# Altium PCB GNSS_FE_PROD.PcbDoc
Units mil, origin at the board's own origin, x right, y up, seen from the top; angles counter-clockwise.
Board outline 6000 x 4000 mil, 2 copper layers (Top Layer, Bottom Layer); 32 components, 20 nets, 100 pads, 0 vias.
Unrouted connection lines stored in the file: 80.
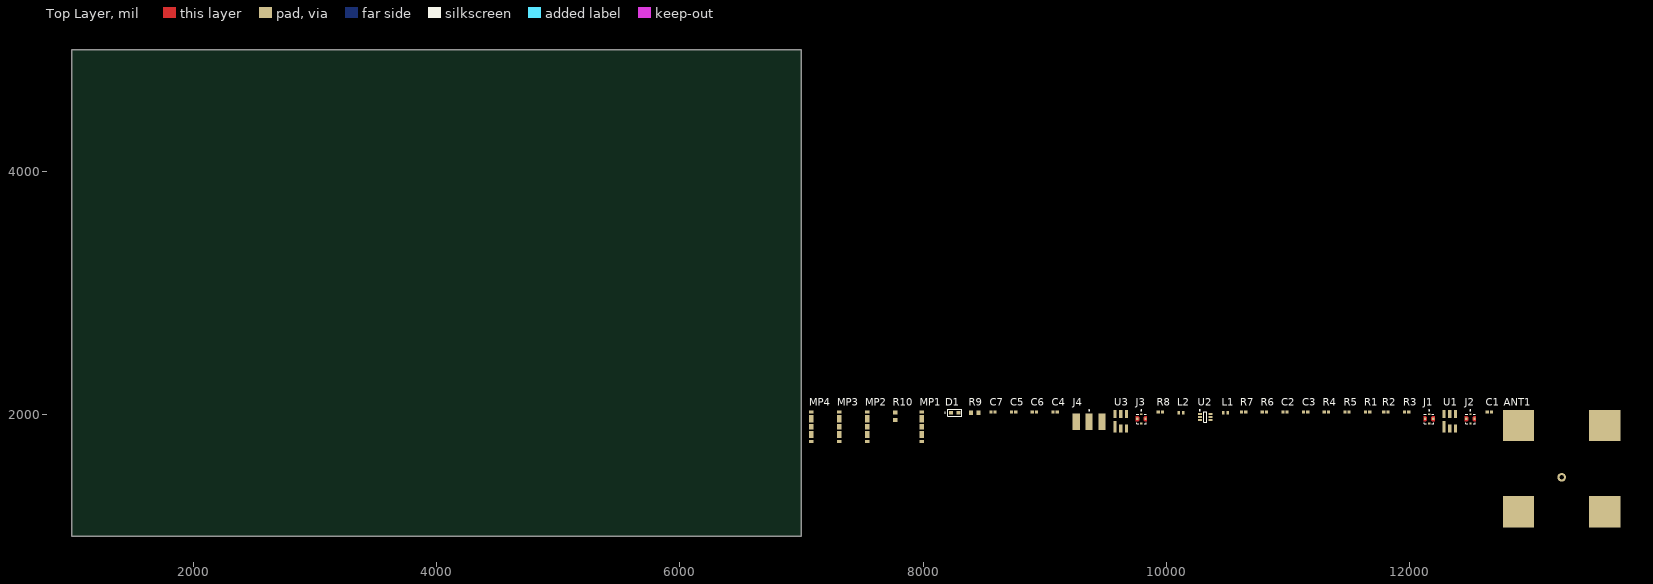
[diagram p0: Top Layer view]
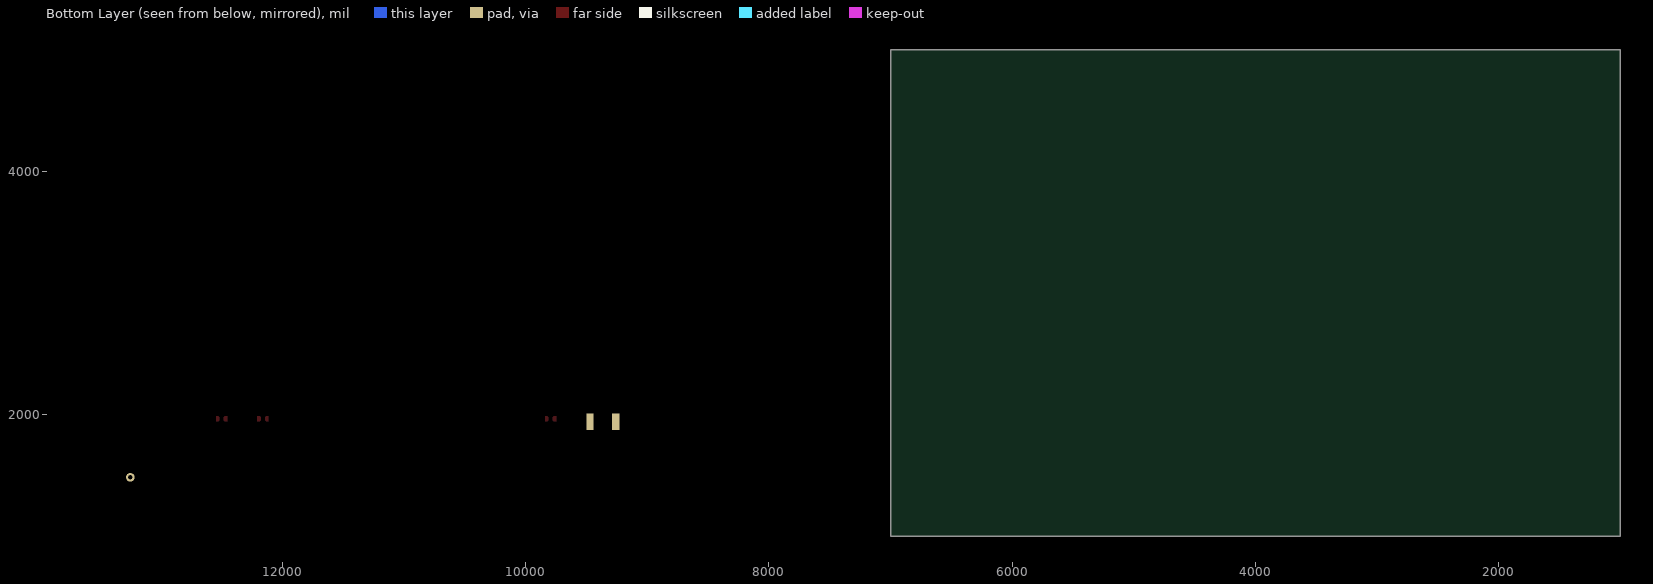
[diagram p1: Bottom Layer view, seen from below]

## Layer stack, top to bottom
Top Solder: solder mask 0.4, Solder Resist, Dk 3.5
Top Layer: signal copper 1.4
Dielectric 1: dielectric 12.6, FR-4, Dk 4.8
Bottom Layer: signal copper 1.4
Bottom Solder: solder mask 0.4, Solder Resist, Dk 3.5

## Board outline
1000,1000 7000,1000 7000,5000 1000,5000

## Design rules (kind name [scope] priority, off if disabled: settings)
Clearance Clearance_1 [OnMid vs OnMid] p1: gap=10 ignorepadtopadclearanceinfootprint=FALSE sourcerule=36 cellrowname=All cellrowtype=0 cellcolname=All cellcoltype=0 innerlayers=TRUE
Clearance Clearance_2 [(ExistsOnLayer('Top Layer') Or ExistsOnLayer('Bottom Layer')) vs (ExistsOnLayer('Top Layer') Or ExistsOnLayer('Bottom Layer'))] p2: gap=10 ignorepadtopadclearanceinfootprint=FALSE sourcerule=36 cellrowname=All cellrowtype=0 cellcolname=All cellcoltype=0 outerlayers=TRUE
Clearance [All] p3: gap=10 ignorepadtopadclearanceinfootprint=FALSE ismatrix=TRUE
PolygonConnect [All] p1: connectstyle=Relief reliefconductorwidth=10 reliefentries=4 polygonreliefangle="90 Angle" airgapwidth=10
RoutingVias [All] p1: holewidth=28 width=50 viastyle="Through Hole" minholewidth=28 minwidth=50 maxholewidth=28 maxwidth=50
SolderMaskExpansion [All] p1: expansion=4 istentingtop=FALSE
Width [All] p1: maxlimit=10 minlimit=10 preferedwidth=10
30 further rules are at their usual default settings.

## Classes and differential pairs
net class RF: NetANT1_1 NetR6_2

## Components (designator, comment, footprint, x,y, rotation, side; value= is the part's Value field where it differs from the comment)
ANT1 "ANT-GNSSCP-TH18L1" ANT-GNSSCP-TH18L1 13250,1555 r0 top
C1 "GRM1555C1H102JA01D" 0402_CAP 12655,2020 r0 top
C2 "GRM1555C1H102JA01D" 0402_CAP 10975,2020 r0 top
C3 "GRM1555C1H102JA01D" 0402_CAP 11145,2020 r0 top
C4 "GRM1555C1H102JA01D" 0402_CAP 9085,2020 r0 top
C5 "GRM1555C1H102JA01D" 0402_CAP 8745,2020 r0 top
C6 "GRM1555C1H102JA01D" 0402_CAP 8915,2020 r0 top
C7 "GRM1555C1H102JA01D" 0402_CAP 8575,2020 r0 top
D1 "Red, 2V, 140°" WL-SMCW 8260,2015 r0 top
J1 "MM8030-2610RJ3" MURATA_MM8030-2610RJ3 12160,1965 r0 top
J2 "MM8030-2610RJ3" MURATA_MM8030-2610RJ3 12500,1965 r0 top
J3 "MM8030-2610RJ3" MURATA_MM8030-2610RJ3 9795,1965 r0 top
J4 "CON-SMA-EDGE-S" RFSOLUTIONS_CON-SMA-EDGE-S 9365,1940 r90 top
L1 "LQW15AN3N6C10D" INDC1006X60N 10485,2015 r0 top value=20nH
L2 "LQW15AN3N6C10D" INDC1006X60N 10120,2015 r0 top value=5.6nH
MP1 "36900000" 36900000 7990,1900 r90 top
MP2 "36900000" 36900000 7540,1900 r90 top
MP3 "36900000" 36900000 7310,1900 r90 top
MP4 "36900000" 36900000 7080,1900 r90 top
R1 "RC0402JR-070RL" 0402_CAP 11655,2020 r0 top
R2 "RC0402JR-070RL" 0402_CAP 11805,2020 r0 top
R3 "RC0402JR-070RL" 0402_CAP 11975,2020 r0 top
R4 "RC0402JR-070RL" 0402_CAP 11315,2020 r0 top
R5 "RC0402JR-070RL" 0402_CAP 11485,2020 r0 top
R6 "RC0402JR-070RL" 0402_CAP 10805,2020 r0 top
R7 "RC0402JR-070RL" 0402_CAP 10635,2020 r0 top
R8 "RC0402JR-070RL" 0402_CAP 9950,2020 r0 top
R9 "" RC0603JR-070RL 8425,2015 r0 top
R10 "RC0603JR-070RL" RC0603JR-070RL 7770,1985 r90 top
U1 "B39162B3913U410" B39162B3913U410 12330,1945 r0 top
U2 "MAX2655EXT+T" MAX2655EXT+T 10320,1980 r0 top
U3 "B39162B3913U410" B39162B3913U410 9625,1945 r0 top

## Footprints (in the part's own frame and the unit in brackets; to place one, negate y for a bottom-side part, rotate by r counter-clockwise, add the part's x,y. Pads: shape width x height; smd on the part's side, far side on the other; paste and mask are expansions set on the pad)
0402_CAP [mm]
  rect 0.66x0.62 smd: 1(-0.44,0) 2(0.44,0)
  body extent -0.53,-0.28 0.53,0.28, height 0.55
36900000 [mm] "Shielding Cabinet Clip"
  rect 0.6x0.9 smd: 1(-3.05,0) 1(3.05,0)
  rect 1.5x0.9 smd: 1(-1.65,0) 1(1.65,0)
  rect 1.2x0.9 smd: 1(0,0)
  body extent -3.25,-0.41 3.25,0.41, height 1.28
ANT-GNSSCP-TH18L1 [mm]
  round 1.8 hole 0.95: 1(0,-1.8)
  rect 6.5x6.5 smd: 2(-9,-9) 2(-9,9) 2(9,-9) 2(9,9)
  body extent -9,-9 9,9, height 4.1
B39162B3913U410 [mm]
  rect 0.65x2.35 smd: 1(-1.2,-1.15)
  rect 0.65x1.6 smd: 2(0,-1.525) 3(1.2,-1.525) 4(1.2,1.525) 5(0,1.525) 6(-1.2,1.525)
  body extent -1.5,-1.5 1.5,1.5, height 1.1
INDC1006X60N [mm]
  rect 0.51x0.73 smd: 1(-0.46,0) 2(0.46,0)
  body extent -0.5,-0.3 0.5,0.3, height 0.6
MAX2655EXT+T [mm] "TSOP, 6-Leads, Body 2.00x1.25mm, Pitch 0.65mm, IPC Medium Density"
  rect 0.85x0.4 smd: 1(-1.125,0.65) 2(-1.125,0) 3(-1.125,-0.65) 4(1.125,-0.65) 5(1.125,0) 6(1.125,0.65)
  silkscreen extent -1.25,-1.1 0.3,1.52, body extent -1.05,-1.1 1.05,1.1, height 1.1
MURATA_MM8030-2610RJ3 [mm]
  rect 0.5x0.4 smd paste-1 mask+0: 1(0,0.95) 2(0,-0.95)
  rect 0.5x0.5 smd paste-1 mask+0: 3(-0.85,0) 4(0.85,0)
  Top Layer region: 1.15,-0.55 0.68,-0.55 0.45,-0.32 0.45,0.32 0.68,0.55 1.15,0.55
  Top Layer region: -0.45,0.32 -0.45,-0.32 -0.68,-0.55 -1.15,-0.55 -1.15,0.55 -0.68,0.55
  silkscreen extent -1,-1 1,1.85, body extent -1,-1.05 1,1.05, height 0.9
RC0603JR-070RL [mm] "Chip Resistor, 2-Leads, Body 1.60x0.80mm, IPC Medium Density"
  rect 0.85x0.9 smd: 1(-0.775,0) 2(0.775,0)
  body extent -0.85,-0.45 0.85,0.45, height 0.55
RFSOLUTIONS_CON-SMA-EDGE-S [mm]
  rect 3.5x1.5 smd: 1(0,0) 2(0,2.7) 2(0,-2.7)
  rect 3.5x1.5 smd far side: 2(0,2.7) 2(0,-2.7)
  silkscreen extent 2.3,-0.1 2.5,0.1, body extent -11.27,-3.18 2.06,3.17, height 3.55
WL-SMCW [mm]
  rect 0.8x0.8 smd: 1(-0.8,0) 2(0.8,0)
  silkscreen extent -2.07,-0.7 1.45,0.7, body extent -0.8,-0.4 0.8,0.4, height 0.7

## Part data
ANT1: "CERAMIC PATCH GNSS ANTENNA"
C1 C2 C3 C6: "CAP CER 1000PF 50V C0G/NP0 0402", Capacitance=1uF
C4: "CAP CER 1000PF 50V C0G/NP0 0402", Capacitance=1800pF
C5: "CAP CER 1000PF 50V C0G/NP0 0402", Capacitance=8.1pF
C7: "CAP CER 1000PF 50V C0G/NP0 0402", Capacitance=1.5pF
D1: library part 150060RS75000, "WL-SMCW Mono-color Chip LED Waterclear, SMT, size 0603, Red, 2V, 140°", Case/Size Code=0603, Emitting Color=Red, Forward Voltage=2V, Manufacturer="Wurth Elektronik", Operating Temperature Max=85°C, Operating Temperature Min=-40°C, Category="Signal LEDs", Chip Technology=AlInGaP, ComponentLink1Description="Website Link", ComponentLink1URL=https://www.we-online.com/redexpert/article/150060RS75000?ad, ComponentLink2Description="Datasheet Link", ComponentLink2URL=https://www.we-online.com/redexpert/spec/150060RS75000?ad, Dominant Wavelength=625nm, Height=0.7mm, Length=1.6mm, Luminous Intensity=250mcd, Manufacturer Part Number=150060RS75000, Match Code=WL-SMCW, Mount="Surface Mount", Packaging="Tape and Reel", Peak Wavelength=630nm, Viewing Angle=140°, Width=0.8mm
J1 J2 J3: "SWG Connector Receptacle, Female Socket 50Ohm Surface Mount Solder", Package=None, Digi-Key_Part_Number=490-5907-1-ND, Digi-Key_Purchase_URL=https://www.digikey.com/product-detail/en/murata-electronics/MM8030-2610RJ3/490-5907-1-ND/3635133?utm_source=snapeda&utm_medium=aggregator&utm_campaign=symbol, MF=Murata, MP=MM8030-2610RJ3, SnapEDA_Link=https://www.snapeda.com/parts/MM8030-2610RJ3/Murata%20Electronics%20North%20America/view-part/271470/?ref=snap
J4: "CONN SMA JACK STR EDGE MNT"
L1 L2: "FIXED IND 3.6NH 900MA 40 MOHM", Package=None, Availability=Unavailable, MP=LQW15AN3N6C10D, Price=None
MP1 MP2 MP3 MP4: "WE-SHC Shielding Cabinet, Clip, Tin Plated, Tape and Reel, 6.5x0.8x1.27mm", Manufacturer="Wurth Elektronik", Operating Temperature Max=125°C, Operating Temperature Min=-40°C, Base Material=Steel, Category="EMC Shielding", ComponentLink1Description="Website Link", ComponentLink1URL=https://www.we-online.com/redexpert/article/36900000?ad, ComponentLink2Description="Datasheet Link", ComponentLink2URL=https://www.we-online.com/redexpert/spec/36900000?ad, Height=1.27mm, Length=6.5mm, Manufacturer Part Number=36900000, Match Code=WE-SHC, Mount="Surface Mount", Packaging="Tape and Reel", Plating="Tin Plated", Type=Clip, Width=0.8mm
R1 R2 R3 R4 R5 R6 R7: "RES 0 OHM JUMPER 1/16W 0402", Case Code (Imperial)=0603, Case Code (Metric)=1608, Manufacturer=Yageo, Max Operating Temperature=155degC, Min Operating Temperature=-55degC, Package Description="2-Pin Surface Mount Device, Body 1.6 x 0.8 mm", Package Quantity=5000, Power Rating=100mW, Resistance=0mOhm, Temperature Coefficient=200ppm/degreesC, Tolerance=5%, Voltage Rating=50V, Case/Package=0603, Composition=ThickFilm, Contact Plating=Tin, Datasheet URL=http://www.yageo.com/NewPortal/yageodocoutput?fileName=/pdf/R-Chip/PYu-RC_Group_51_RoHS_L_5.pdf, Datasheet Version="Rev. 5, 10/2016", Depth=0.8mm, Height=0.45mm, Lead Free=LeadFree, Length=1.6mm, Manufacturer URL=http://www.yageo.com/, Military Standard=Not, Number of Pins=2, Package Reference=0603, Packaging=TapeandReel, Radiation Hardening=No, REACH SVHC=NoSVHC, RoHSCompliant=true, Termination=SMD/SMT, Voltage Rating (DC)=50V, Width=0.8mm
R8: "RES 0 OHM JUMPER 1/16W 0402", Case Code (Imperial)=0603, Case Code (Metric)=1608, Manufacturer=Yageo, Max Operating Temperature=155degC, Min Operating Temperature=-55degC, Package Description="2-Pin Surface Mount Device, Body 1.6 x 0.8 mm", Package Quantity=5000, Power Rating=100mW, Resistance=10kΩ, Temperature Coefficient=200ppm/degreesC, Tolerance=5%, Voltage Rating=50V, Case/Package=0603, Composition=ThickFilm, Contact Plating=Tin, Datasheet URL=http://www.yageo.com/NewPortal/yageodocoutput?fileName=/pdf/R-Chip/PYu-RC_Group_51_RoHS_L_5.pdf, Datasheet Version="Rev. 5, 10/2016", Depth=0.8mm, Height=0.45mm, Lead Free=LeadFree, Length=1.6mm, Manufacturer URL=http://www.yageo.com/, Military Standard=Not, Number of Pins=2, Package Reference=0603, Packaging=TapeandReel, Radiation Hardening=No, REACH SVHC=NoSVHC, RoHSCompliant=true, Termination=SMD/SMT, Voltage Rating (DC)=50V, Width=0.8mm
R9: library part RC0603JR-070RL, "Chip Resistor, 0 Ohm, +/- 5%, 0.1 W, -55 to 155 degC, 0603 (1608 Metric), RoHS, Tape and Reel", Case Code (Imperial)=0603, Case Code (Metric)=1608, Manufacturer=Yageo, Max Operating Temperature=155degC, Min Operating Temperature=-55degC, Package Description="2-Pin Surface Mount Device, Body 1.6 x 0.8 mm", Package Quantity=5000, Power Rating=100mW, Resistance=357Ω, Temperature Coefficient=200ppm/degreesC, Tolerance=5%, Voltage Rating=50V, Case/Package=0603, Composition=ThickFilm, Contact Plating=Tin, Datasheet URL=http://www.yageo.com/NewPortal/yageodocoutput?fileName=/pdf/R-Chip/PYu-RC_Group_51_RoHS_L_5.pdf, Datasheet Version="Rev. 5, 10/2016", Depth=0.8mm, Height=0.45mm, Lead Free=LeadFree, Length=1.6mm, Manufacturer URL=http://www.yageo.com/, Military Standard=Not, Number of Pins=2, Package Reference=0603, Packaging=TapeandReel, Radiation Hardening=No, REACH SVHC=NoSVHC, RoHSCompliant=true, Termination=SMD/SMT, Voltage Rating (DC)=50V, Width=0.8mm
R10: "Chip Resistor, 0 Ohm, +/- 5%, 0.1 W, -55 to 155 degC, 0603 (1608 Metric), RoHS, Tape and Reel", Case Code (Imperial)=0603, Case Code (Metric)=1608, Manufacturer=Yageo, Max Operating Temperature=155degC, Min Operating Temperature=-55degC, Package Description="2-Pin Surface Mount Device, Body 1.6 x 0.8 mm", Package Quantity=5000, Power Rating=100mW, Resistance=0mOhm, Temperature Coefficient=200ppm/degreesC, Tolerance=5%, Voltage Rating=50V, Case/Package=0603, Composition=ThickFilm, Contact Plating=Tin, Datasheet URL=http://www.yageo.com/NewPortal/yageodocoutput?fileName=/pdf/R-Chip/PYu-RC_Group_51_RoHS_L_5.pdf, Datasheet Version="Rev. 5, 10/2016", Depth=0.8mm, Height=0.45mm, Lead Free=LeadFree, Length=1.6mm, Manufacturer URL=http://www.yageo.com/, Military Standard=Not, Number of Pins=2, Package Reference=0603, Packaging=TapeandReel, Radiation Hardening=No, REACH SVHC=NoSVHC, RoHSCompliant=true, Termination=SMD/SMT, Voltage Rating (DC)=50V, Width=0.8mm
U1 U3: "FILTER SAW 1.588GHZ 6SMD"
U2: "IC AMP GPS 1.4GHZ-1.7GHZ SC70-6"

## Nets (pads, with @x,y where several pads share a name; then routed paths per layer and width w, separated by ;. In a path a pad name is that pad's centre, name@x,y a point inside that pad or via, vN(x,y) a via of type N, cw(c..) or ccw(c..) an arc to the next point about the centre after c; other vN are vias at no path point)
GND: ANT1.2 C1.2 C7.1 D1.1 J1.3 J1.4 J2.3 J2.4 J3.3 J3.4 J4.2 MP1.1 MP2.1 MP3.1 MP4.1 R4.1 R5.1 R7.2 R9.2 U1.1 U1.3 U1.4 U1.6 U2.2 U2.5 U3.1 U3.3 U3.4 U3.6
NetANT1_1: ANT1.1 R1.2 R4.2
NetC1_1: C1.1 R2.1 R3.2
NetC2_1: C2.1 C3.1 R6.1
NetC2_2: C2.2 R1.1 R2.2 R5.2
NetC3_2: C3.2 J1.1 R3.1
NetC4_1: C4.1 J2.2
NetC4_2: C4.2 C7.2 L2.2
NetC5_1: C5.1 U3.5
NetC5_2: C5.2 J4.1 L1.1
NetC6_1: C6.1 R8.2 U2.6
NetC6_2: C6.2 J3.1
NetD1_2: D1.2 R10.2
NetJ1_2: J1.2 U1.2
NetJ2_1: J2.1 U1.5
NetJ3_2: J3.2 U3.2
NetL2_1: L2.1 U2.3
NetR6_2: R6.2 R7.1
NetR9_1: R9.1 U2.1
VCC: L1.2 R8.1 R10.1 U2.4